# Altium PCB 04-LcdTFT3.2inch.PcbDoc
Units mm, origin at the board's own origin, x right, y up, seen from the top; angles counter-clockwise.
Board outline 95 x 83.44 mm, 4 copper layers (Top Layer, Internal Plane 1, Internal Plane 2, Bottom Layer), stack 0.462 mm thick; 14 components, 44 nets, 71 pads, 0 vias.
Unrouted connection lines stored in the file: 24.
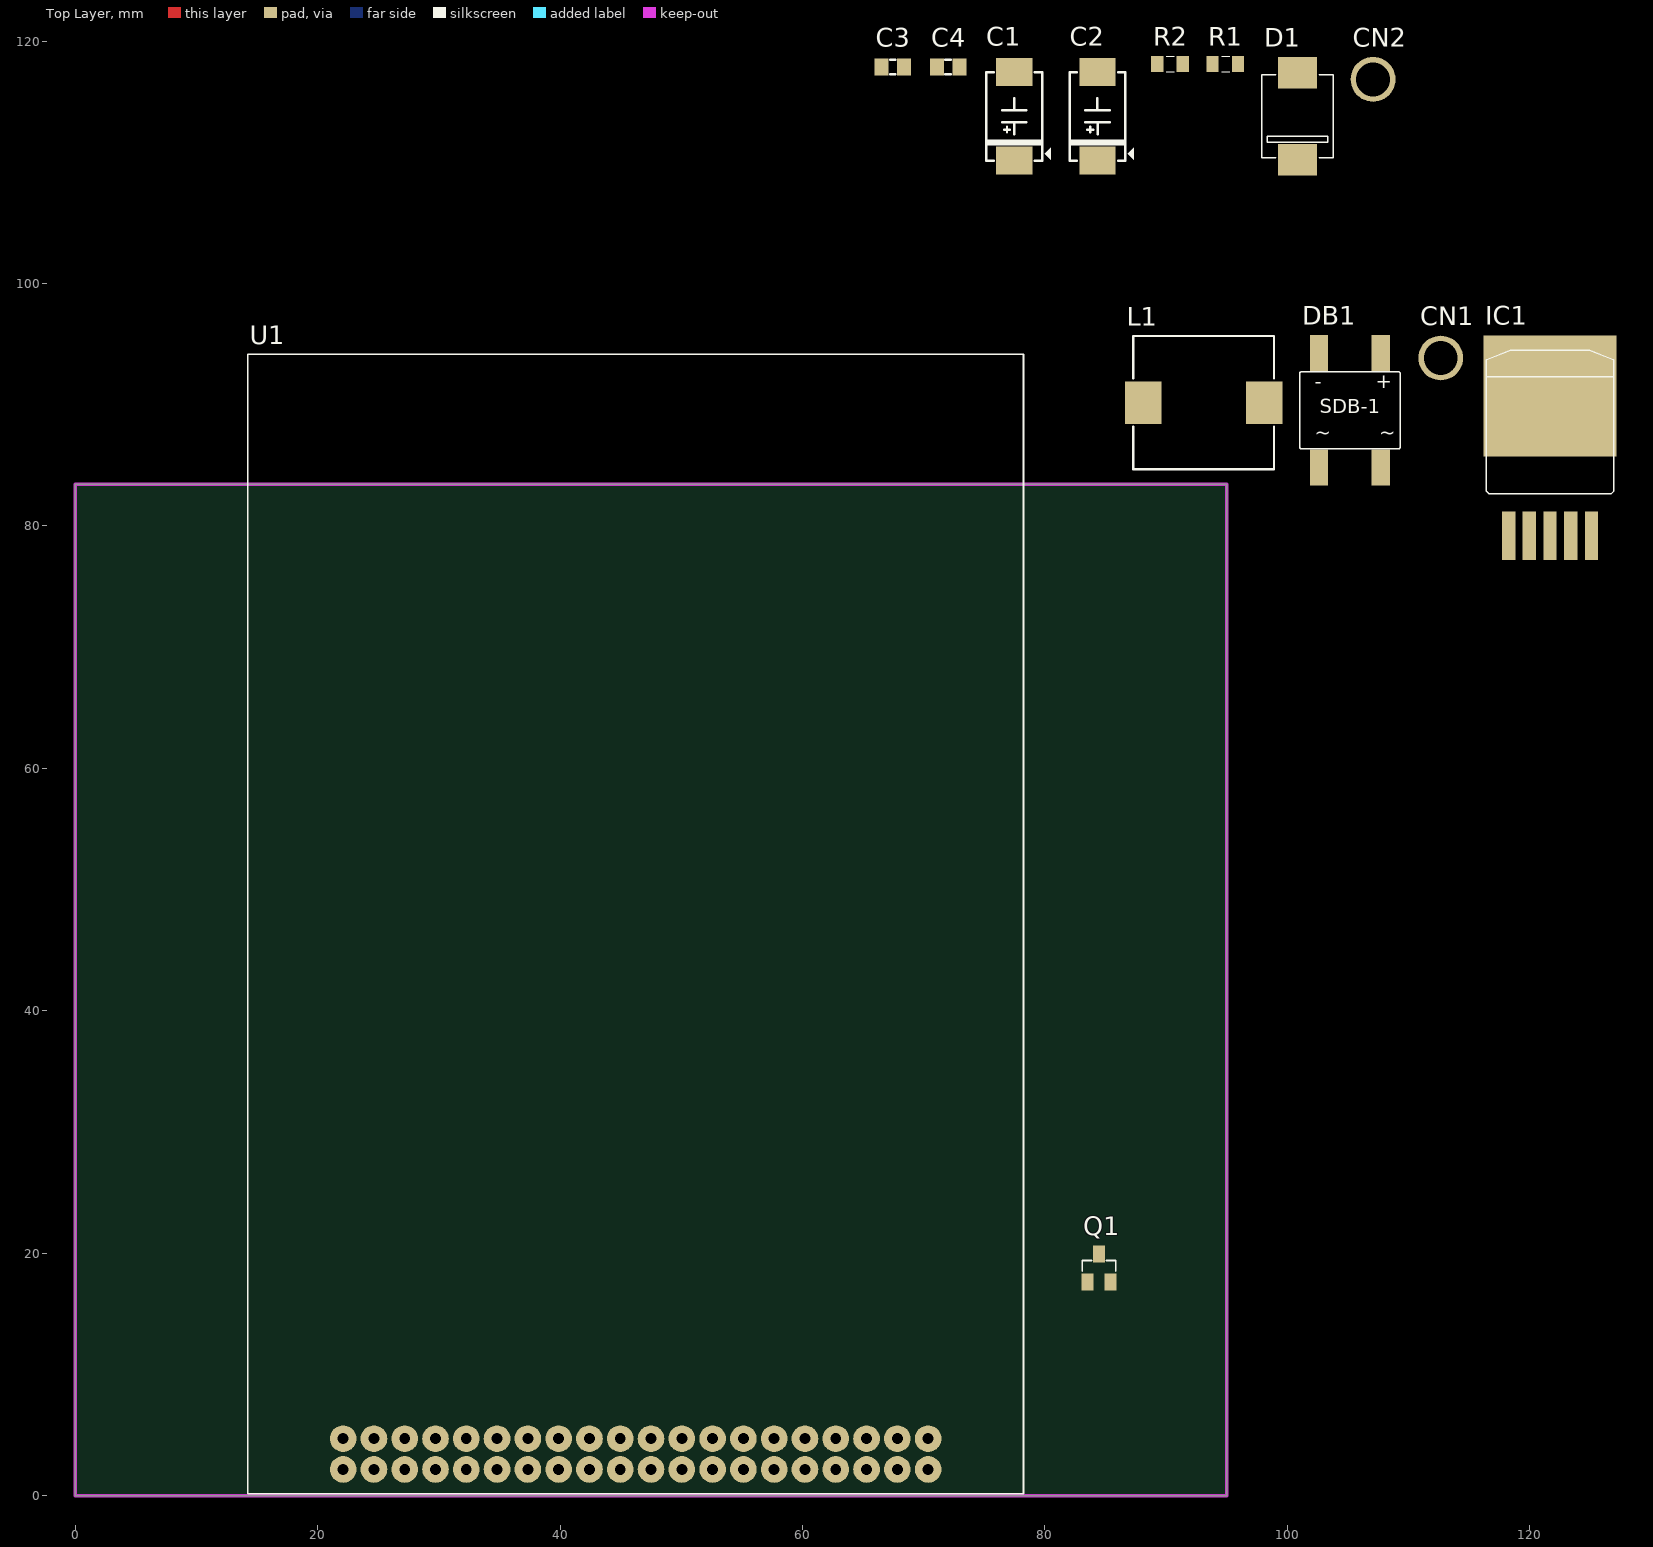
[diagram p0: Top Layer view]
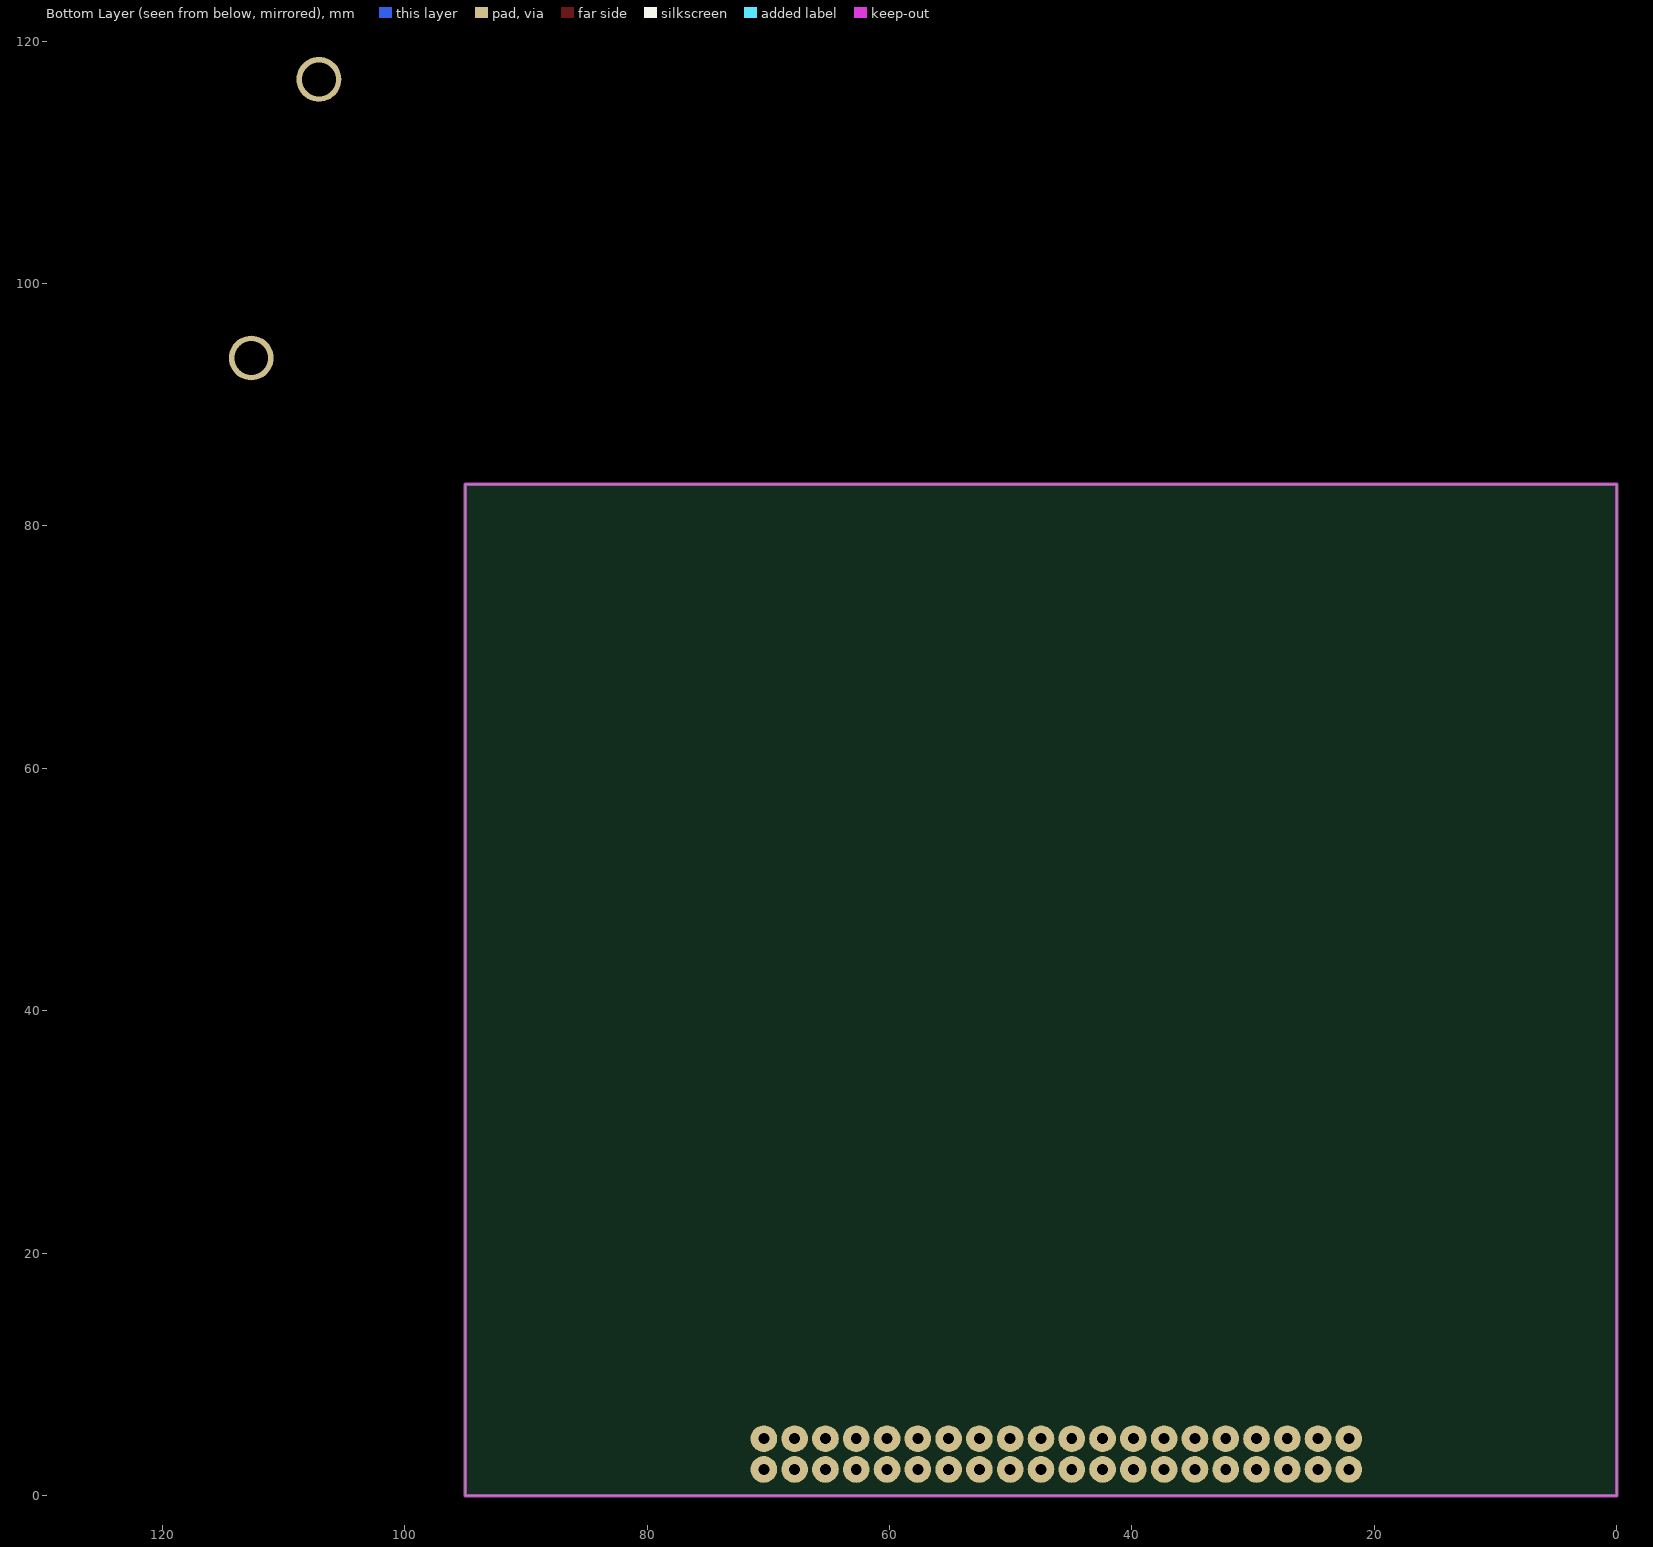
[diagram p1: Bottom Layer view, seen from below]
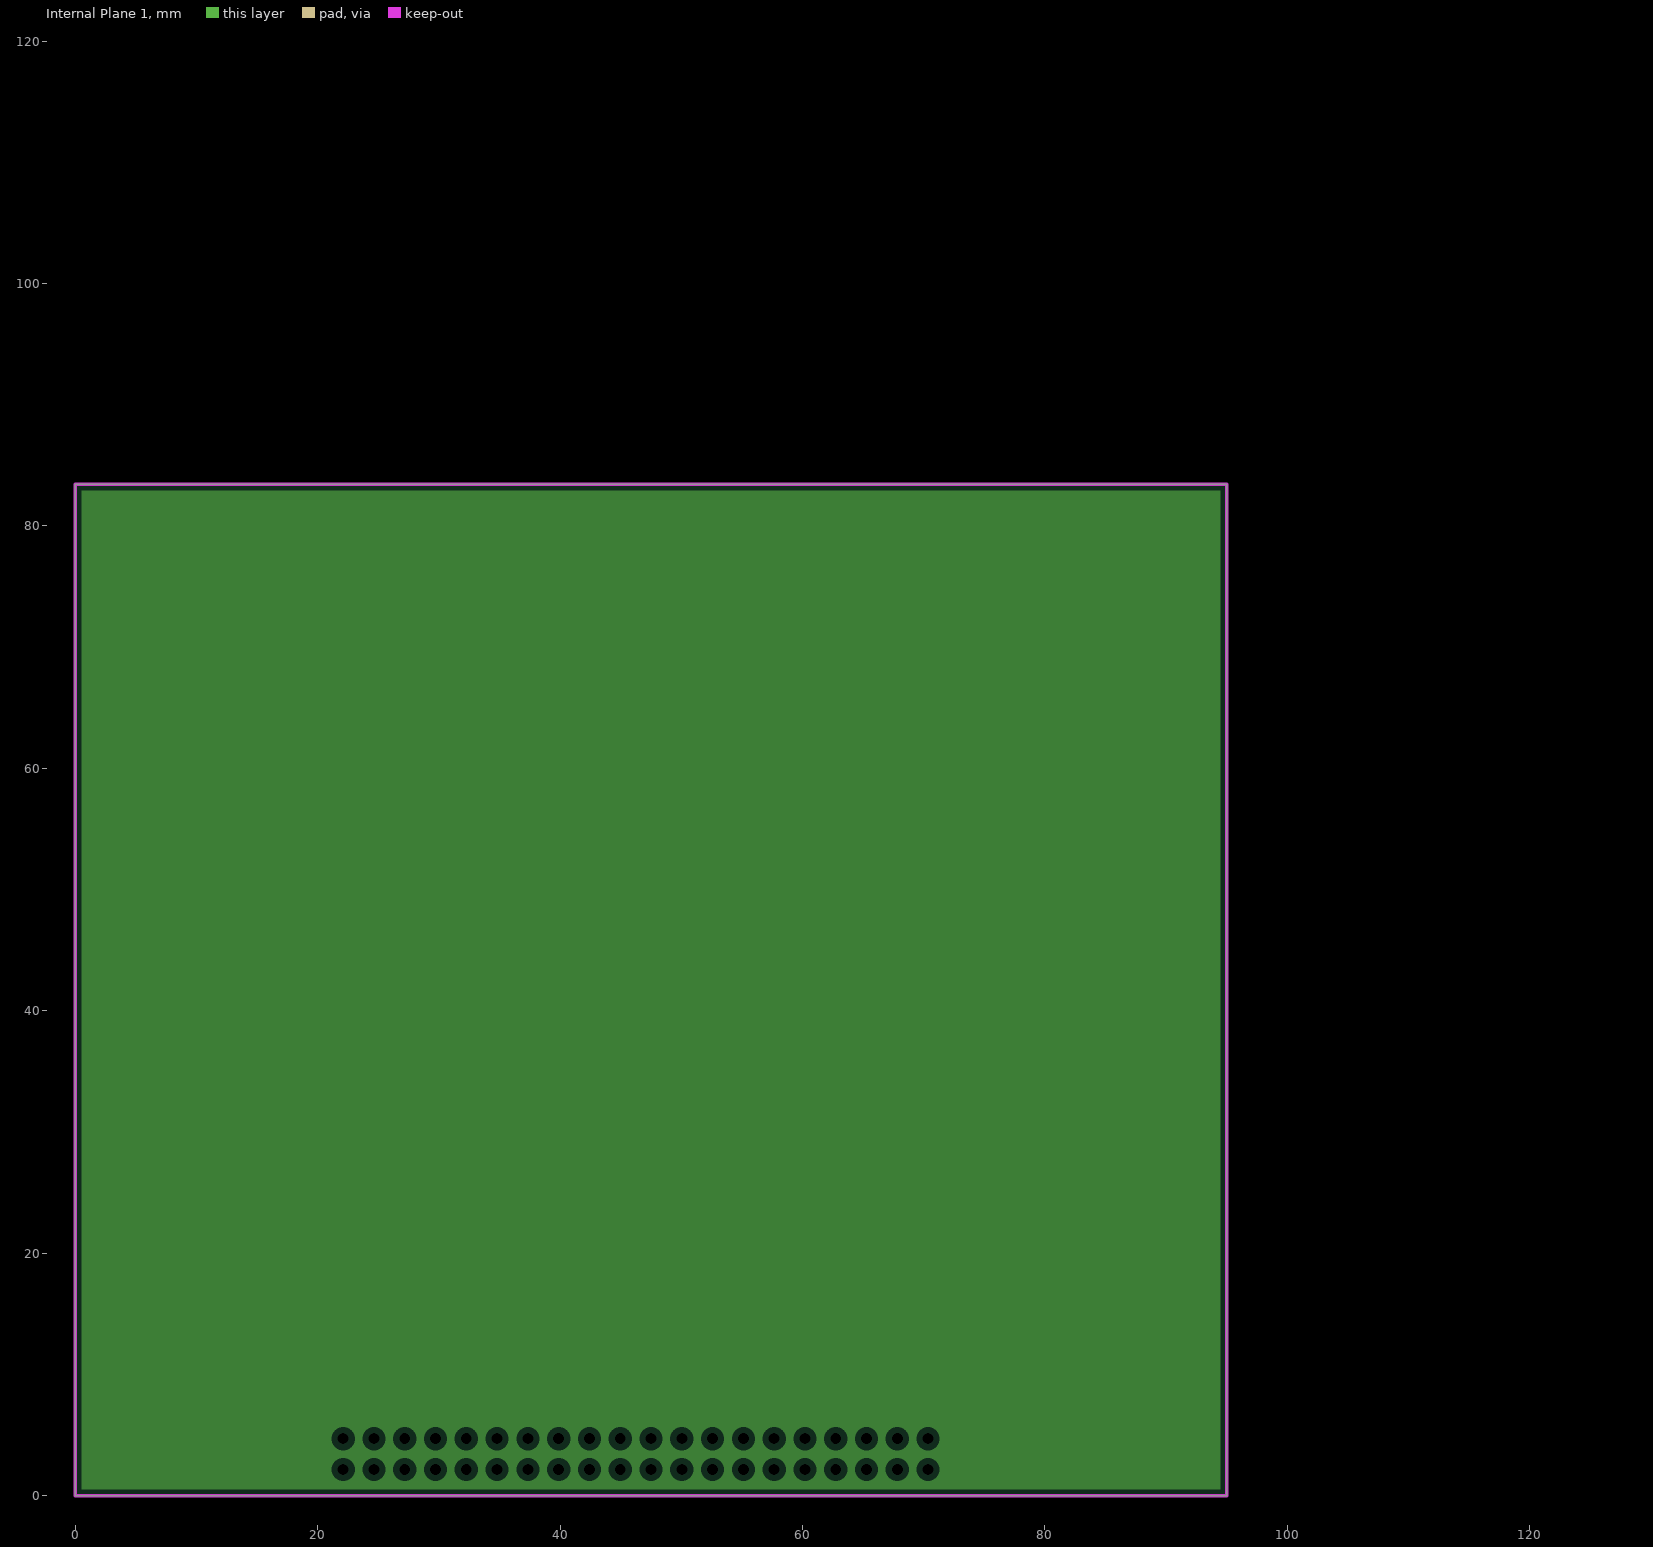
[diagram p2: Internal Plane 1, clearances drawn from the general rule]
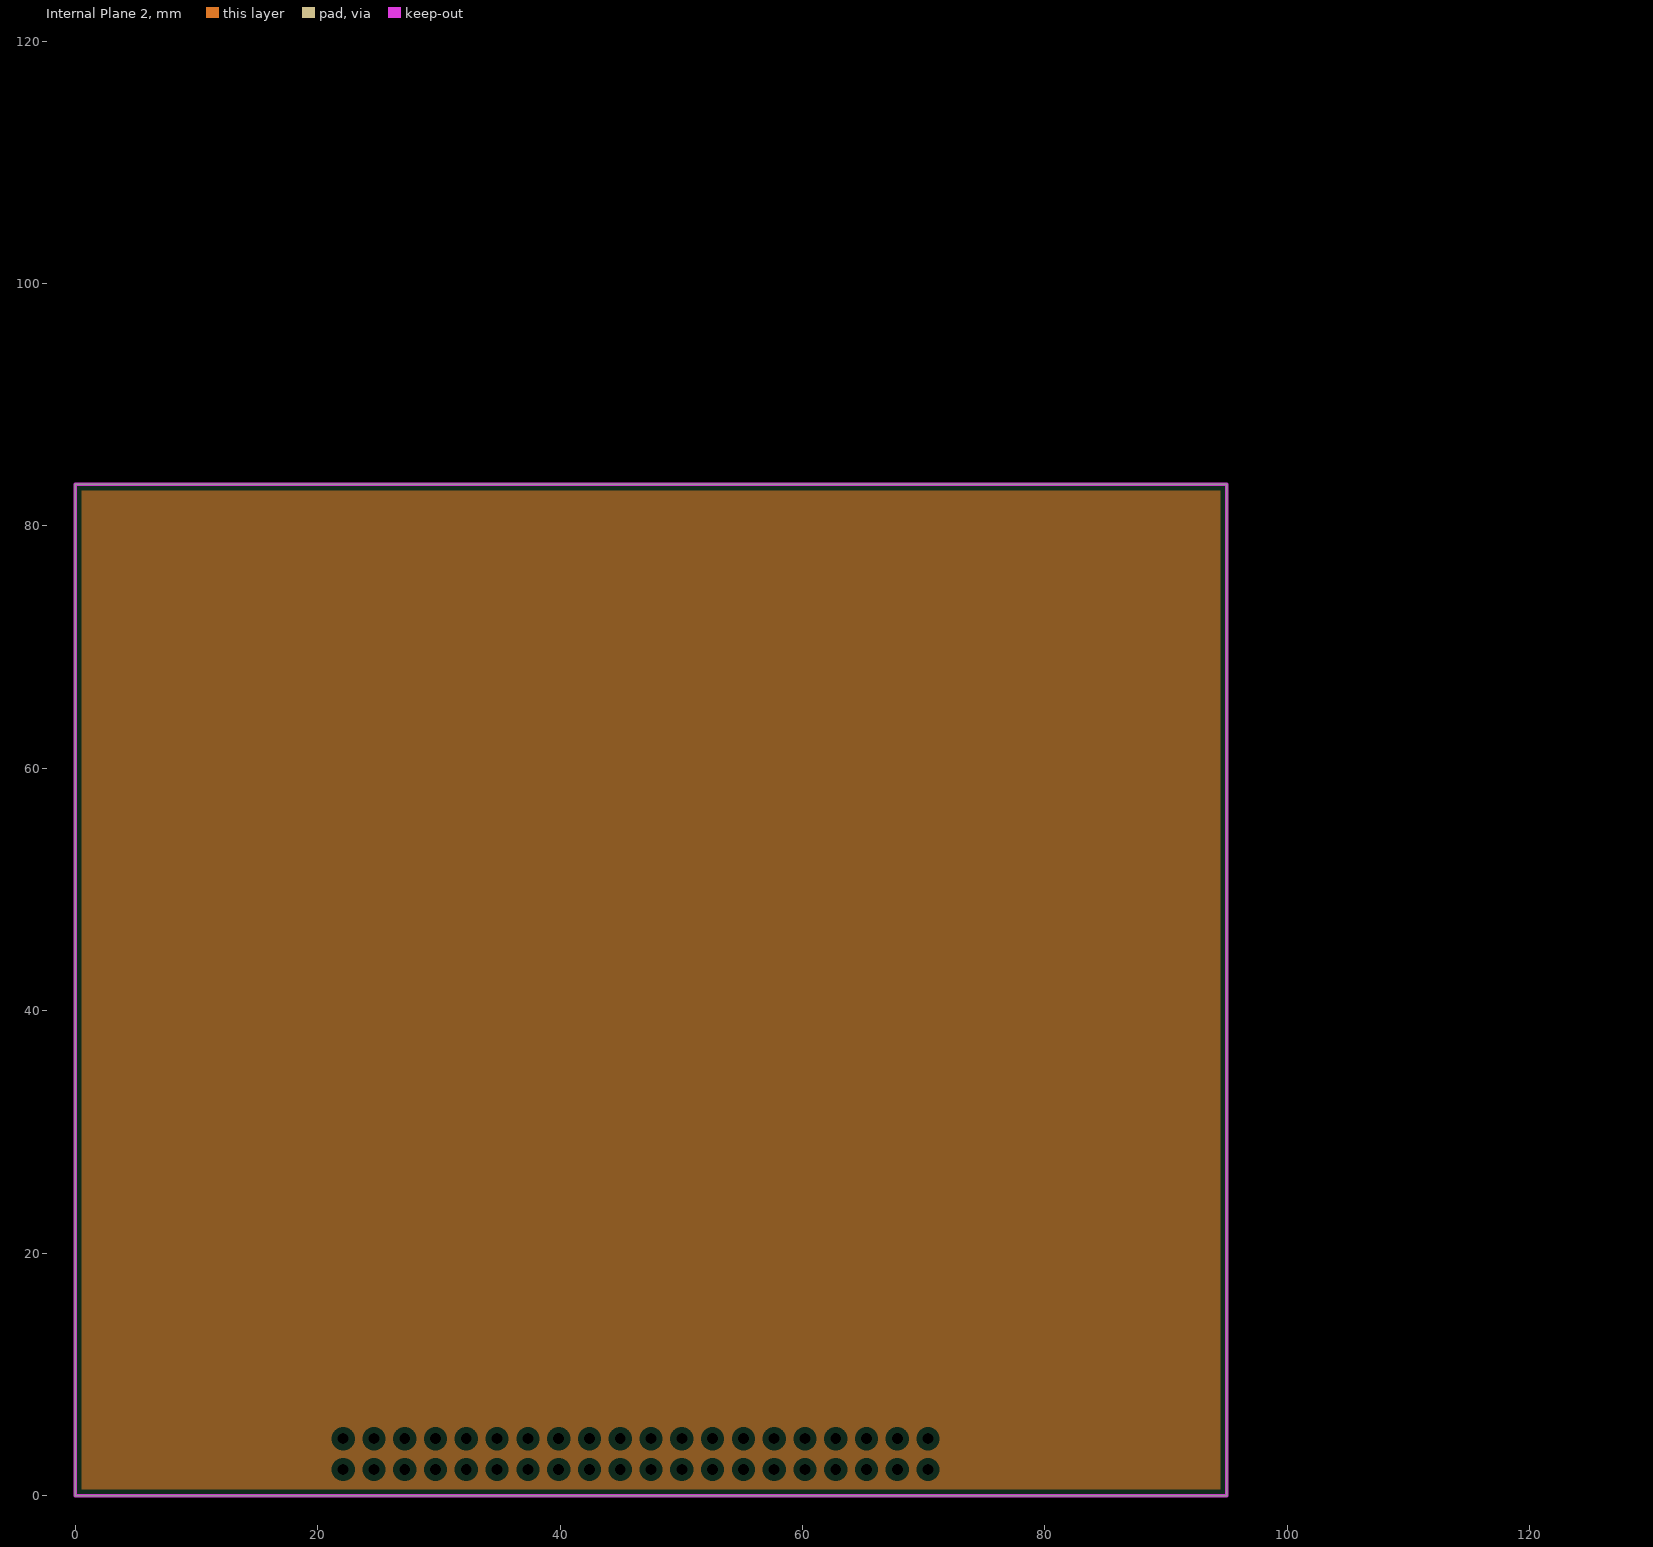
[diagram p3: Internal Plane 2, clearances drawn from the general rule]

## Layer stack, top to bottom
Top Solder: solder mask 0.0102, Solder Resist, Dk 3.5
Top Layer: signal copper 0.0356
Internal Plane 1: plane copper 0.0356
Internal Plane 2: plane copper 0.0356
Dielectric 1: dielectric 0.32, FR-4, Dk 4.8
Bottom Layer: signal copper 0.0356
Bottom Solder: solder mask 0.0102, Solder Resist, Dk 3.5

## Board outline
0,0 0,83.439 94.996,83.439 94.996,0

## Design rules (kind name [scope] priority, off if disabled: settings)
Clearance [All] p1: gap=0.2
PlaneClearance [All] p1: clearance=0.508
PlaneConnect [All] p1: planeconnectstyle=Relief reliefexpansion=0.508 reliefentries=4 reliefconductorwidth=0.254 reliefairgap=0.254
PolygonConnect [All] p1: connectstyle=Relief reliefconductorwidth=0.254 reliefentries=4 polygonreliefangle="90 Angle" airgapwidth=0.254
RoutingVias [All] p1: holewidth=0.6 width=1 viastyle="Through Hole" minholewidth=0.711 minwidth=1.27 maxholewidth=0.711 maxwidth=1.27
SolderMaskExpansion [All] p1: expansion=0.102
Width [All] p1: maxlimit=0.2 minlimit=0.2 preferedwidth=0.2
28 further rules are at their usual default settings.

## Components (designator, comment, footprint, x,y, rotation, side; value= is the part's Value field where it differs from the comment)
C1 "470uF" C-TANT-7343-31-CASEA 77.47,113.791 r90 top
C2 "470uF" C-TANT-7343-31-CASEA 84.328,113.791 r90 top
C3 "104" C-0805 67.437,117.855 r0 top
C4 "104" C-0805 72.009,117.855 r0 top
CN1 "VIN1" M3 112.649,93.853 r0 top
CN2 "VIN2" M3 107.061,116.839 r0 top
D1 "1N5822" D-DO214-AB 100.838,113.791 r0 top
DB1 "Diode Brideg" D-DB-1A-SMD 105.156,89.535 r0 top
IC1 "LM2576 ADJ" TO-263-5L 121.666,84.963 r0 top
L1 "150mH" L-SMD-10x10 93.091,90.17 r0 top
Q1 "AO3415" SOT-23-3 84.455,18.796 r0 top
R1 "10K" RM-0805 94.869,118.109 r0 top
R2 "8.2K" RM-0805 90.297,118.109 r0 top
U1 "LCD-TFT-3.2" LCD-TFT-3.2' 78.228,0.159 r90 top

## Footprints (in the part's own frame and the unit in brackets; to place one, negate y for a bottom-side part, rotate by r counter-clockwise, add the part's x,y. Pads: shape width x height; smd on the part's side, far side on the other; paste and mask are expansions set on the pad)
C-0805 [mm] "Chip Capacitor, 2-Leads, Body 2.0x1.3mm, IPC Medium Density"
  rect 1.15x1.4 smd: 1(-0.925,0) 2(0.925,0)
  silkscreen extent -0.22,-0.6 0.23,0.6, body extent -1,-0.63 1,0.63, height 0.5
C-TANT-7343-31-CASEA [mm] "Tantalium Capacitor 7343-31"
  rect 2.3x3 smd: 1(-3.65,0) 2(3.65,0)
  silkscreen extent -3.65,-3 3.65,2.3, body extent -3.8,-2.3 3.8,2.3, height 3.1
D-DB-1A-SMD [mm] "DB106S"
  rect 1.5x3 smd: 1(-2.55,-4.713) 2(2.55,-4.713) 3(2.55,4.713) 4(-2.55,4.713)
  silkscreen extent -4.15,-3.18 4.15,3.18, body extent -4.15,-4.95 4.15,4.95, height 3.35
D-DO214-AB [mm]
  rect 3.2x2.6 smd: 1(0,3.6) 2(0,-3.6)
  silkscreen extent -2.95,-3.44 2.95,3.44, body extent -2.95,-3.81 2.95,3.82, height 2.4
L-SMD-10x10 [mm] "SMD Inductor X-Size = Y-Size = 10mm"
  rect 3x3.5 smd: 1(-5,0) 2(5,-0.015)
  silkscreen extent -5.8,-5.5 5.8,5.5, body extent -5.61,-5.51 5.59,5.49, height 4.05
LCD-TFT-3.2' [mm]
  round 2.2 hole 0.9: 1(2,56.13) 2(2,53.59) 3(2,51.05) 4(2,48.51) 5(2,45.97) 6(2,43.43) 7(2,40.89) 8(2,38.35) 9(2,35.81) 10(2,33.27) 11(2,30.73) 12(2,28.19) 13(2,25.65) 14(2,23.11) 15(2,20.57) 16(2,18.03) 17(2,15.49) 18(2,12.95) 19(2,10.41) 20(2,7.87) 21(4.54,7.87) 22(4.54,10.41) 23(4.54,12.95) 24(4.54,15.49) 25(4.54,18.03) 26(4.54,20.57) 27(4.54,23.11) 28(4.54,25.65) 29(4.54,28.19) 30(4.54,30.73) 31(4.54,33.27) 32(4.54,35.81) 33(4.54,38.35) 34(4.54,40.89) 35(4.54,43.43) 36(4.54,45.97) 37(4.54,48.51) 38(4.54,51.05) 39(4.54,53.59) 40(4.54,56.13)
  silkscreen extent 0,0 94.01,64.01, body extent 0,0 94,64, height 5
M3 [mm]
  round 3.7 hole 2.8: 1(0,0)
RM-0805 [mm] "Resistor SMD 80x50mil"
  rect 1x1.3 smd: 1(-1.041,0) 2(1.067,0)
  silkscreen extent -0.3,-0.64 0.36,0.64, body extent -0.97,-0.64 1.03,0.62, height 0.58
SOT-23-3 [mm]
  rect 1x1.4 smd: 1(-0.95,-1.154) 2(0.95,-1.154) 3(0,1.154)
  silkscreen extent -1.4,-0.3 1.4,0.6, body extent -1.46,-1.15 1.46,1.15, height 1.22
TO-263-5L [mm]
  rect 1.1x4 smd: 1(-3.42,-5.765) 2(-1.71,-5.765) 3(0,-5.765) 4(1.71,-5.765) 5(3.42,-5.765)
  rect 11x10 smd: HM(0,5.765)
  silkscreen extent -5.27,-2.33 5.27,9.52, body extent -5.27,-6.3 5.27,9.52, height 4.95

## Part data
C1 C2: library part CP1, "Cap P  0,1uF < 22uF , 16 - 50V"
C3 C4: library part CN
CN1 CN2: library part COCDONGM3
D1: library part D1A, "Diode 1A"
DB1: library part DB, "Convert AC to DC voltage, 4 pin"
IC1: library part LM2576, "LM2576"
L1: library part L1, "Inductor"
Q1: library part IRF9540, "HEXFET P-Channel Power MOSFET"
R1 R2: library part R, "Resistor 1/4W"

## Nets (pads, with @x,y where several pads share a name; then routed paths per layer and width w, separated by ;. In a path a pad name is that pad's centre, name@x,y a point inside that pad or via, vN(x,y) a via of type N, cw(c..) or ccw(c..) an arc to the next point about the centre after c; other vN are vias at no path point)
+2V7: L1.2 Q1.2 R1.2 U1.2
+5V: C2.1 C4.2
+12V: C1.1 C3.2 DB1.3 IC1.1
CS: U1.15
DB0: U1.21
DB1: U1.22
DB2: U1.23
DB3: U1.24
DB4: U1.25
DB5: U1.26
DB6: U1.27
DB7: U1.28
DB8: U1.7
DB9: U1.8
DB10: U1.9
DB11: U1.10
DB12: U1.11
DB13: U1.12
DB14: U1.13
DB15: U1.14
F_CS: U1.16
F_HOLD: U1.40
F_WP: U1.39
FB: IC1.4 R1.1 R2.2
GND: C1.2 C2.2 C3.1 C4.1 D1.1 DB1.4 IC1.3 IC1.5 IC1.HM R2.1 U1.1
LED_A: Q1.1
LED_BR: Q1.3 U1.19
NetCN1_1: CN1.1 DB1.2
NetCN2_1: CN2.1 DB1.1
NetD1_2: D1.2 IC1.2 L1.1
RD: U1.6
RESET: U1.17
RS: U1.4
SD_CS: U1.38
SD_DIN: U1.37
SD_OUT: U1.35
SD_SCK: U1.36
T_BUSY: U1.32
T_CLK: U1.29
T_CS: U1.30
T_DIN: U1.31
T_IRQ: U1.34
T_OUT: U1.33
WR: U1.5
pads on no net: U1.3 U1.18 U1.20

## Keep-outs
Keep-Out Layer:
  the board outline again, w0.3

## Text inside footprints (layer, text, board x,y; h text height)
DB1: Top Overlay "~        ~" at 102.235,86.741 h2; Top Overlay "-         +" at 102.235,90.932 h2; Top Overlay "SDB-1" at 102.648,88.895 h2